# EAGLE board covid-respirator-ProtoB (EAGLE 7.3.0)

Size 160 x 100 mm. Coordinates in mm from the lower left corner, seen from the top.
Outline: 0,0 160,0 160,100 0,100 0,0
Copper layers (1*16): Top 0.035mm / dielectric 1.5mm / Bottom 0.035mm
Design rules "default": minimum track width 10mil, minimum drill 24mil, track to track 8mil, track to pad 8mil, pad to pad 8mil, via to via 8mil, smd to smd 8mil, copper to edge 40mil, drill to drill 8mil, minimum pad ring 10mil, minimum via ring 8mil, stop-mask expansion 4mil, vias tented up to drill 0mil, thermal gap 10mil

## Footprints (pad centres in the part's own frame; a part is rotated, then mirrored left to right if it is on the bottom)
AB9V = drill 1.118 pad 3.15 octagon: + 0,2.54; - 0,-2.54
150CLZ-1010 = smd 4.3 x 2.5: + 4.15,0; - -4.15,0
C050-050X075 = drill 0.813 octagon: 1 -2.54,0; 2 2.54,0
19560 = drill 0.813 pad 1.778 long: 1 -2.54,0; 2 2.54,0
TO220H = drill 1.118 long: 1 -2.54,-10.16; 2 0,-10.16; 3 2.54,-10.16 | hole 3.302: 0,4.826
TO220 = drill 1.118 long: 1 -2.54,-6.35; 2 0,-6.35; 3 2.54,-6.35 | hole 3.302: 0,11.176
0207/10 = drill 0.813 octagon: 1 -5.08,0; 2 5.08,0
F/EB20P = drill 1.016 pad 2.159 octagon: + 12.7,0; - -12.7,0
TO92-CBE = drill 0.813 long: B 0,0; C -2.54,0; E 2.54,0

## Placement (x,y rotation side)
BATTERY  12V  [AB9V]  -17.78,30.48 0 top  (outside the outline)
C1  47uF/25V  [150CLZ-1010]  -30.48,30.48 0 top  (outside the outline)
C2  47uF/25v  [150CLZ-1010]  -44.45,30.48 0 top  (outside the outline)
C3  100nF  [C050-050X075]  -16.51,39.37 0 top  (outside the outline)
C4  10uF  [C050-050X075]  -25.4,39.37 0 top  (outside the outline)
F1  2A  [19560]  -73.66,-34.29 0 top  (outside the outline)
IC2  L7805CV-DG  [TO220H]  -33.02,12.7 0 top  (outside the outline)
Q1  VNP35N07-E  [TO220]  -19.05,8.89 0 top  (outside the outline)
R1  100  [0207/10]  -35.56,38.1 0 top  (outside the outline)
R2  3k  [0207/10]  -19.05,45.72 0 top  (outside the outline)
R3  1k  [0207/10]  -31.75,45.72 0 top  (outside the outline)
R4  100  [0207/10]  -44.45,45.72 0 top  (outside the outline)
R5  100  [0207/10]  -19.05,50.8 0 top  (outside the outline)
R6  1k  [0207/10]  -62.23,-27.94 0 top  (outside the outline)
R7  1k  [0207/10]  -62.23,-33.02 0 top  (outside the outline)
R8  1k  [0207/10]  -62.23,-38.1 0 top  (outside the outline)
SG1  [F/EB20P]  -36.83,-12.7 0 top  (outside the outline)
T2  BC548  [TO92-CBE]  -64.77,-20.32 0 top  (outside the outline)

## Library data of the parts
BATTERY = battery
C1-C4 R1-R8 = rcl
F1 = fuse; MPN: 56000001009; OC_FARNELL: 1185363; OC_NEWARK: 15P8392
IC2 = linear
Q1 = transistor-fet
SG1 = buzzer; OC_FARNELL: unknown; OC_NEWARK: unknown
T2 = transistor

## Nets
+12V: C1.+ F1.2 IC2.1 R2.2 SG1.+
A1: C4.1 R5.1
A3: R2.1 R3.2
AGND: C1.- C2.- C3.2 C4.2 IC2.2
AREF: C2.+ C3.1 IC2.3
D5: R1.2
D6: R4.2
D13: R7.2
GND: BATTERY.- Q1.3 R3.1 R6.2 R8.1 T2.E
N$1: R1.1
N$4: Q1.2
N$6: Q1.1 R4.1 R8.2
N$9: R5.2
N$12: SG1.- T2.C
N$13: R6.1 R7.1 T2.B
N$15: BATTERY.+ F1.1

## Tracks (layer width: path | path; a pad name or v marks a point on that pad's centre or on a via)
+12V  (4 unrouted)
A1  (1 unrouted)
A3  (1 unrouted)
AGND  (4 unrouted)
AREF  (2 unrouted)
GND  (5 unrouted)
N$6  (2 unrouted)
N$12  (1 unrouted)
N$13  (2 unrouted)
N$15  (1 unrouted)